# EAGLE board MSi001_board (EAGLE 9.6.2)
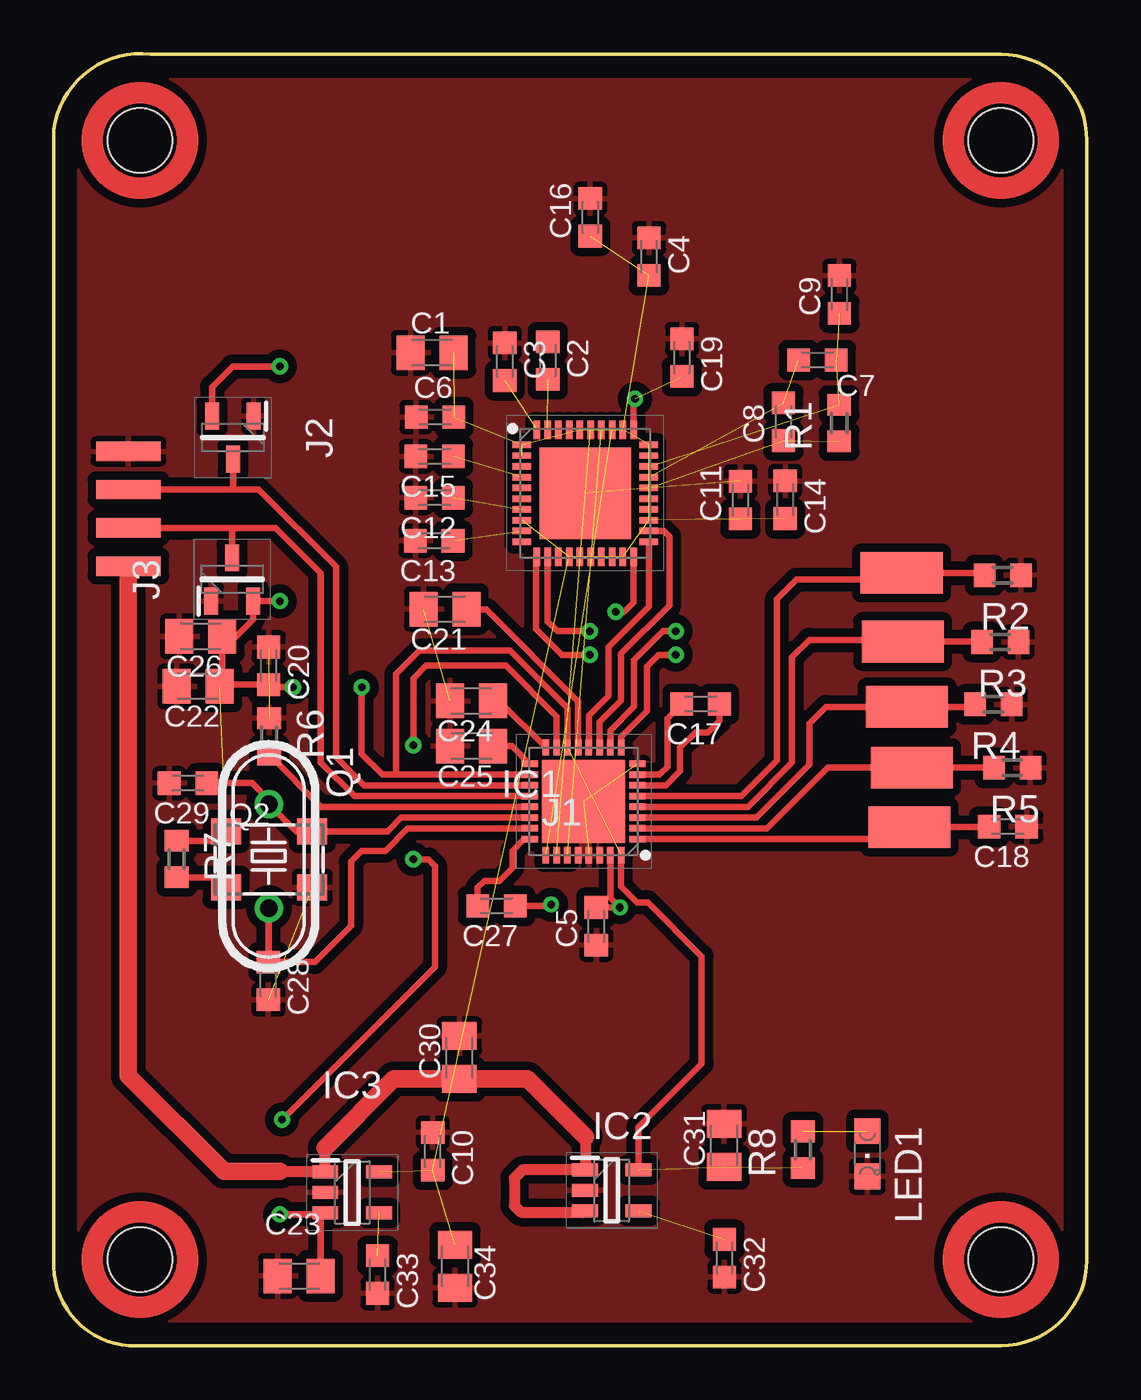
[diagram p0: board, top side]
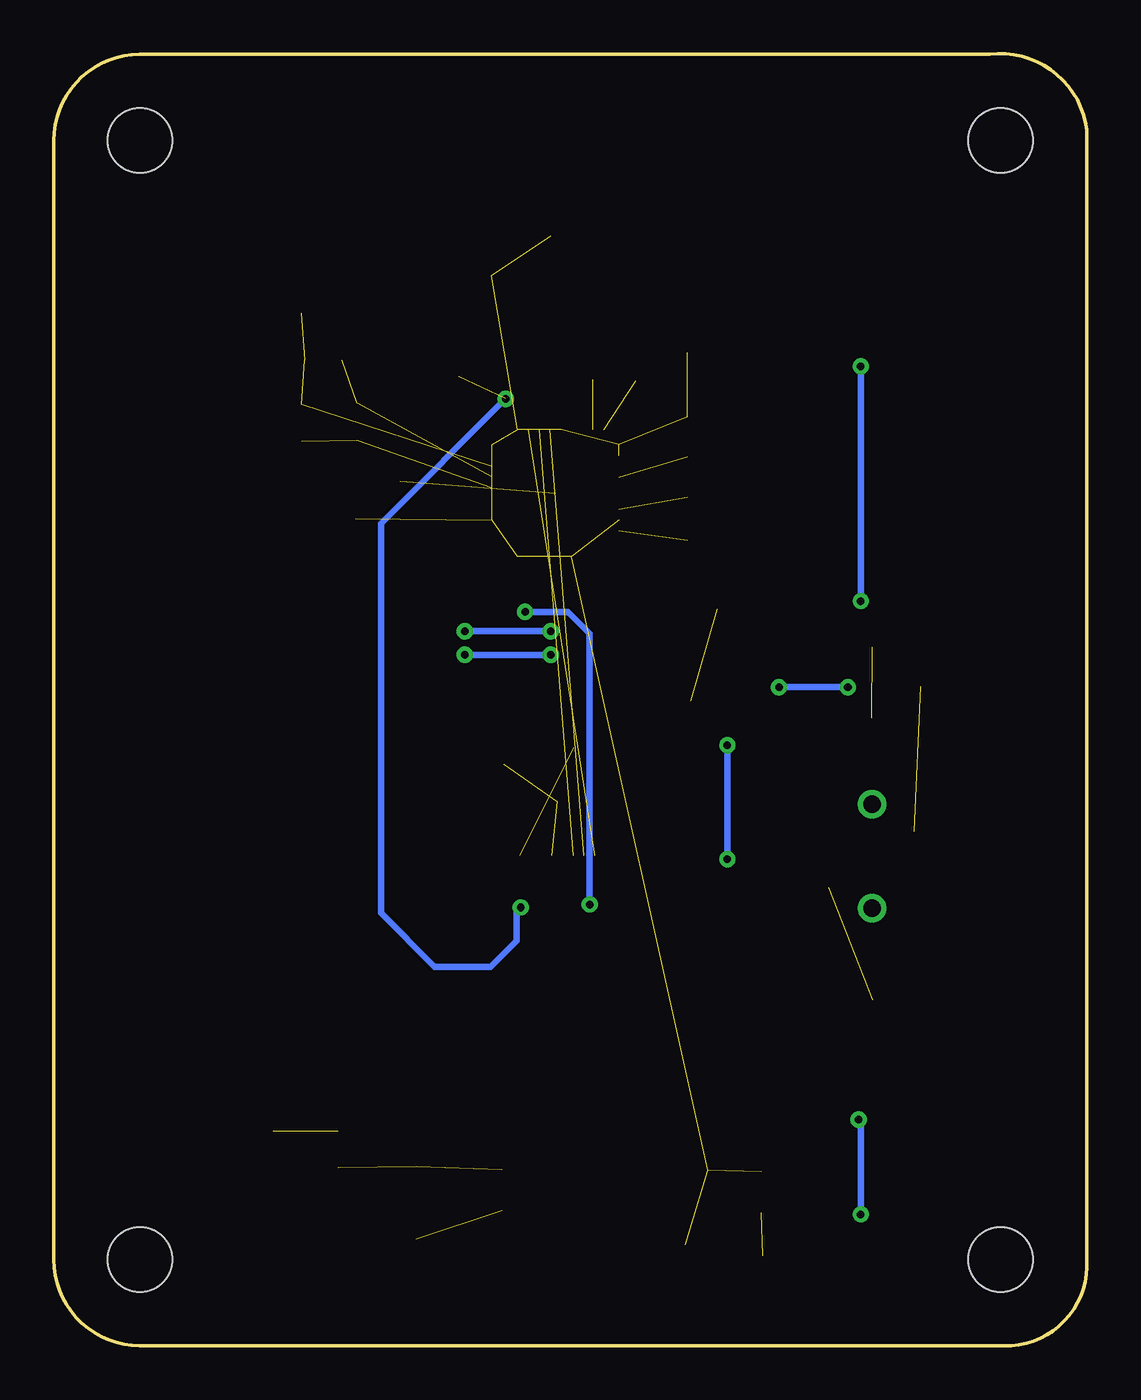
[diagram p1: board, bottom side, seen from below]

Size 48.01 x 60.03 mm. Coordinates in mm from the lower left corner, seen from the top.
Outline: 3.51,0 arc-90 0.01,4 0.01,56.5 arc-90 4.51,60 44.01,60 arc-90 48.01,56 48.01,4 arc-90 44.01,0 3.51,0
Copper layers (1*16): Top 0.035mm / dielectric 1.5mm / Bottom 0.035mm
Design rules "default": minimum track width 6mil, minimum drill 0.35mm, track to track 6mil, track to pad 6mil, pad to pad 6mil, via to via 6mil, smd to smd 6mil, copper to edge 40mil, drill to drill 6mil, minimum pad ring 10mil, minimum via ring 8mil, stop-mask expansion 4mil, vias tented up to drill 0mil, thermal gap 10mil

## Footprints (pad centres in the part's own frame; a part is rotated, then mirrored left to right if it is on the bottom)
C0805K = smd 1.3 x 1.6: 1 -1,0; 2 1,0
C0603K = smd 1.05 x 1.08: 1 -0.875,0; 2 0.875,0
QFN50P600X600X90-41N = smd 0.85 x 0.3: 1 -2.95,2.25; 2 -2.95,1.75; 3 -2.95,1.25; 4 -2.95,0.75; 5 -2.95,0.25; 6 -2.95,-0.25; 7 -2.95,-0.75; 8 -2.95,-1.25; 9 -2.95,-1.75; 10 -2.95,-2.25; 21 2.95,-2.25; 22 2.95,-1.75; 23 2.95,-1.25; 24 2.95,-0.75; 25 2.95,-0.25; 26 2.95,0.25; 27 2.95,0.75; 28 2.95,1.25; 29 2.95,1.75; 30 2.95,2.25 | smd 0.3 x 0.85: 11 -2.25,-2.95; 12 -1.75,-2.95; 13 -1.25,-2.95; 14 -0.75,-2.95; 15 -0.25,-2.95; 16 0.25,-2.95; 17 0.75,-2.95; 18 1.25,-2.95; 19 1.75,-2.95; 20 2.25,-2.95; 31 2.25,2.95; 32 1.75,2.95; 33 1.25,2.95; 34 0.75,2.95; 35 0.25,2.95; 36 -0.25,2.95; 37 -0.75,2.95; 38 -1.25,2.95; 39 -1.75,2.95; 40 -2.25,2.95 | smd 4.25 x 4.25: 41 0,0
SOT95P280X145-5N = smd 1.2 x 0.6: 1 -1.25,0.95; 2 -1.25,0; 3 -1.25,-0.95; 4 1.25,-0.95; 5 1.25,0.95
QFN50P500X500X90-33N = smd 0.75 x 0.3: 1 -2.5,1.75; 2 -2.5,1.25; 3 -2.5,0.75; 4 -2.5,0.25; 5 -2.5,-0.25; 6 -2.5,-0.75; 7 -2.5,-1.25; 8 -2.5,-1.75; 17 2.5,-1.75; 18 2.5,-1.25; 19 2.5,-0.75; 20 2.5,-0.25; 21 2.5,0.25; 22 2.5,0.75; 23 2.5,1.25; 24 2.5,1.75 | smd 0.3 x 0.75: 9 -1.75,-2.5; 10 -1.25,-2.5; 11 -0.75,-2.5; 12 -0.25,-2.5; 13 0.25,-2.5; 14 0.75,-2.5; 15 1.25,-2.5; 16 1.75,-2.5; 25 1.75,2.5; 26 1.25,2.5; 27 0.75,2.5; 28 0.25,2.5; 29 -0.25,2.5; 30 -0.75,2.5; 31 -1.25,2.5; 32 -1.75,2.5 | smd 3.85 x 3.85: 33 0,0
SOT97P230X110-3N = smd 1.25 x 0.65: 1 -1,0.97; 2 -1,-0.97; 3 1,0
USB-SOLDER-PADS = smd 3 x 0.9: D+ 0,-0.889; D- 0,0.889; GND 0,-2.667; VBUS 0,2.667
CHIPLED_0805 = smd 1.2 x 1.2: A 0,-1.05; C 0,1.05
HC49/S = drill 0.813: 1 -2.413,0; 2 2.413,0
5.0X3.2_KXO-83-TCXO = smd 1.4 x 1.2: 1 -2,-1.3; 2 2,-1.3; 3 2,1.3; 4 -2,1.3
R0603 = smd 1 x 1.1: 1 -0.85,0; 2 0.85,0
3MM_HOLE = hole 3: 0,0
SMD_PIN = smd 1.93 x 3.81: P$1 0,0

## Placement (x,y rotation side)
C1  1uF  [C0805K]  17.58,46.14 0 top
C2  100nF  [C0603K]  22.96,45.77 270 top
C3  100nF  [C0603K]  20.96,45.72 270 top
C4  10nF  [C0603K]  27.66,50.6 270 top
C5  10nF  [C0603K]  25.21,19.49 90 top
C6  10nF  [C0603K]  17.72,43.15 0 top
C7  6800pF  [C0603K]  35.48,45.8 180 top
C8  33nF  [C0603K]  33.91,42.93 90 top
C9  10nF  [C0603K]  36.51,48.85 90 top
C10  10nF  [C0603K]  17.61,9.03 270 top
C11  10nF  [C0603K]  31.91,39.29 90 top
C12  10nF  [C0603K]  17.7,39.4 180 top
C13  10nF  [C0603K]  17.68,37.4 180 top
C14  10nF  [C0603K]  33.99,39.31 270 top
C15  10nF  [C0603K]  17.7,41.32 180 top
C16  10nF  [C0603K]  24.93,52.43 90 top
C17  10nF  [C0603K]  30.06,29.82 180 top
C18  10nF  [C0603K]  44.34,24.12 180 top
C19  10nF  [C0603K]  29.19,45.91 270 top
C20  10nF  [C0603K]  9.99,31.59 270 top
C21  10uF  [C0805K]  18.18,34.22 180 top
C22  10uF  [C0805K]  6.72,30.64 180 top
C23  10uF  [C0805K]  11.4,3.24 180 top
C24  1uF  [C0805K]  19.41,29.96 180 top
C25  1uF  [C0805K]  19.42,27.86 180 top
C26  1uF  [C0805K]  6.83,32.96 180 top
C27  10nF  [C0603K]  20.58,20.44 180 top
C28  18pF  [C0603K]  9.97,16.95 270 top
C29  18pF  [C0603K]  6.24,26.14 180 top
C30  10uF  [C0805K]  18.85,13.39 90 top
C31  10uF  [C0805K]  31.15,9.31 90 top
C32  10nF  [C0603K]  31.17,4.07 270 top
C33  10nF  [C0603K]  15.05,3.31 270 top
C34  10uF  [C0805K]  18.65,3.69 270 top
IC1  MSI001  [QFN50P600X600X90-41N]  24.7,39.61 0 top
IC2  LP2985-33  [SOT95P280X145-5N]  25.93,7.22 0 top
IC3  LP2985-28  [SOT95P280X145-5N]  13.87,7.12 0 top
J1  MSI2500  [QFN50P500X500X90-33N]  24.62,25.29 180 top
J2  BAV99-G  [SOT97P230X110-3N]  8.33,42.2 270 top
J3  BAV99-G  [SOT97P230X110-3N]  8.29,35.61 90 top
JP1  USB_SOLDER_PADS  [USB-SOLDER-PADS]  3.47,38.89 180 top
LED1  [CHIPLED_0805]  37.81,8.92 180 top
Q1  24MHz  [HC49/S]  9.99,22.75 270 top
Q2  [5.0X3.2_KXO-83-TCXO]  10.01,22.6 0 top
R1  390R  [R0603]  36.5,42.87 90 top
R2  10k  [R0603]  44.1,35.8 180 top
R3  10k  [R0603]  43.98,32.7 180 top
R4  10k  [R0603]  43.66,29.8 180 top
R5  10k  [R0603]  44.54,26.85 180 top
R6  510R  [R0603]  10.01,28.31 270 top
R7  10k  [R0603]  5.71,22.61 270 top
R8  10k  [R0603]  34.81,9.11 90 top
U$1  3MM_HOLE  [3MM_HOLE]  4.01,4 0 top
U$2  SMD_PIN  [SMD_PIN]  39.87,26.86 90 top
U$3  SMD_PIN  [SMD_PIN]  39.65,29.68 270 top
U$4  SMD_PIN  [SMD_PIN]  39.45,32.72 270 top
U$5  SMD_PIN  [SMD_PIN]  39.4,35.91 270 top
U$6  3MM_HOLE  [3MM_HOLE]  44.01,4 0 top
U$7  3MM_HOLE  [3MM_HOLE]  4.01,56 0 top
U$8  3MM_HOLE  [3MM_HOLE]  44.01,56 0 top
VCC_GPIO  SMD_PIN  [SMD_PIN]  39.75,24.1 270 top

## Library data of the parts
C1-C34 = rcl; SPICEPREFIX: C
IC1 = MSI001; DESCRIPTION: Multi-mode Tuner; HEIGHT: 0.9mm; MANUFACTURER_NAME: MIRICS; MANUFACTURER_PART_NUMBER: MSI001
IC2 IC3 = LP2985-30DBVR; ARROW_PART_NUMBER: LP2985-30DBVR; ARROW_PRICE-STOCK: https://www.arrow.com/en/products/lp2985-30dbvr/texas-instruments; DESCRIPTION: 150-mA Low-noise Low-dropout Regulator With Shutdown; HEIGHT: 1.45mm; MANUFACTURER_NAME: Texas Instruments; MANUFACTURER_PART_NUMBER: LP2985-30DBVR; MOUSER_PART_NUMBER: 595-LP2985-30DBVR; MOUSER_PRICE-STOCK: https://www.mouser.co.uk/ProductDetail/Texas-Instruments/LP2985-30DBVR?qs=iSMark9AYDWJqjjCQuouOw%3D%3D
J1 = MSI2500; DESCRIPTION: Mirics FlexiTVTM USB Interface IC; HEIGHT: 0.9mm; MANUFACTURER_NAME: MIRICS; MANUFACTURER_PART_NUMBER: MSI2500
J2 J3 = BAV99-G; DESCRIPTION: BAV99-G; HEIGHT: 1.1mm; MANUFACTURER_NAME: Sensitron Semiconductors; MANUFACTURER_PART_NUMBER: BAV99-G
JP1 = SparkFun-Connectors
LED1 = led
Q1 = crystal; OC_FARNELL: 1667008; OC_NEWARK: unknown
Q2 = crystal-geyer_V1_0
R1-R8 = rcl; SPICEPREFIX: R
U$1-U$8 VCC_GPIO = mylib

## Nets
GND: C1.1 C3.1 C4.1 C5.1 C6.1 C9.2 C10.1 C11.2 C12.2 C13.2 C14.1 C15.2 C16.2 C18.1 C19.1 C20.1 C21.2 C22.2 C23.2 C24.2 C25.2 C26.2 C28.2 C29.2 C30.2 C31.2 C32.2 C33.2 C34.2 IC1.41 IC2.2 IC3.2 J1.8 J1.28 J1.29 J1.30 J1.33 J2.1 J3.1 JP1.GND LED1.C Q2.2 R2.1 R3.1 R4.1 R5.1 R6.1
HFPDRT: C2.1
I_IN_N: IC1.12 J1.10
I_IN_P: IC1.11 J1.9
LBAND-IN: IC1.24
LBAND-INB: IC1.25
N$1: C2.2 IC1.39
N$2: C3.2 IC1.40
N$3: C7.1 C9.1 IC1.28 R1.2
N$4: C8.1 IC1.26 R1.1
N$5: C7.2 C8.2 IC1.27
N$6: C12.1 IC1.7
N$7: C13.1 IC1.9
N$8: C15.1 IC1.4
N$9: C17.2 J1.7
N$10: C17.1 J1.6
N$11: C18.2 J1.1 VCC_GPIO.P$1
N$12: J1.2 R5.2 U$2.P$1
N$13: J1.3 R4.2 U$3.P$1
N$14: J1.4 R3.2 U$4.P$1
N$15: J1.5 R2.2 U$5.P$1
N$16: C21.1 J1.13
N$17: C24.1 J1.16
N$18: C25.1 J1.17
N$19: J1.21 R6.2
N$20: C27.2 J1.24
N$21: C29.1 J1.22 Q1.1 Q2.3
N$22: C28.1 J1.23 Q1.2
N$23: LED1.A R8.2
N$24: Q2.1 R7.2
N$25: C30.1 IC2.1 IC2.3 IC3.1 JP1.VBUS
N$26: C33.1 IC3.4
N$27: C32.1 IC2.4
Q_IN_N: IC1.21 J1.12
Q_IN_P: IC1.22 J1.11
REFCLK: C27.1 IC1.20
SPI_CLK: IC1.34 J1.27
SPI_DATA: IC1.35 J1.26
SPI_LAT: IC1.33 J1.25
UHF_400_1000MHZ: IC1.6
USB_DM: J1.20 J3.3 JP1.D-
USB_DP: J1.19 J2.3 JP1.D+
V18-SYNTH: C23.1 IC3.3 J1.15
VDDI: C5.2 C19.2 IC1.31 J1.31
VDIG: C20.2 C22.1 C26.1 C31.1 IC2.5 J1.14 J1.18 J1.32 J2.2 J3.2 Q2.4 R7.1 R8.1
VHF_50_120MHZ: IC1.10
VHF_120_250MHZ: IC1.3
VRF: C1.2 C4.2 C6.2 C10.2 C11.1 C14.2 C16.1 C34.1 IC1.1 IC1.2 IC1.8 IC1.14 IC1.15 IC1.18 IC1.19 IC1.23 IC1.29 IC1.30 IC1.32 IC1.36 IC3.5

## Tracks (layer width: path | path; a pad name or v marks a point on that pad's centre or on a via)
GND  (6 unrouted)
  pour Top (isolate 0.4): 50.51,-3 -2.49,-3 -2.49,62.5 50.51,62.5
I_IN_N  (via drill 0.35)
  Top 0.305: J1.10 25.87,28.59 26.97,29.69 26.97,31.86 28.31,33.2 v28.91,33.2 | IC1.12 22.95,33.66 23.41,33.2 v24.91,33.2
  Bottom 0.305: v28.91,33.2 v24.91,33.2
I_IN_P  (via drill 0.35)
  Top 0.305: J1.9 26.37,28.29 27.57,29.49 27.57,31.56 28.11,32.1 v28.91,32.1 | v24.91,32.1 23.61,32.1 22.41,33.3 22.41,36.62 IC1.11
  Bottom 0.305: v28.91,32.1 v24.91,32.1
N$1  (1 unrouted)
N$2  (1 unrouted)
N$3  (3 unrouted)
N$4  (2 unrouted)
N$5  (2 unrouted)
N$6  (1 unrouted)
N$7  (1 unrouted)
N$8  (1 unrouted)
N$9
  Top 0.305: J1.7 28.15,26.54 28.51,26.9 28.51,29.14 C17.2
N$10
  Top 0.305: J1.6 28.45,26.04 29.11,26.7 29.11,27.8 29.81,28.5 30.41,28.5 30.93,29.02 C17.1
N$11
  Top 0.305: J1.1 39.19,23.54 VCC_GPIO.P$1 43.44,24.1 C18.2
N$12
  Top 0.305: J1.2 33.15,24.04 35.97,26.86 U$2.P$1 R5.2
N$13
  Top 0.305: J1.3 32.65,24.54 35.11,27 35.11,28.9 35.89,29.68 U$3.P$1 42.69,29.68 R4.2
N$14
  Top 0.305: J1.4 32.25,25.04 34.31,27.1 34.31,32 35.11,32.8 40.51,32.8 40.71,32.6 39.57,32.6 U$4.P$1 43.11,32.72 R3.2
N$15
  Top 0.305: J1.5 31.95,25.54 33.61,27.2 33.61,34.7 34.51,35.6 40.11,35.6 39.8,35.91 U$5.P$1 43.14,35.91 R2.2
N$16
  Top 0.305: J1.13 24.37,29.94 20.11,34.2 19.18,34.2 C21.1
N$17
  Top 0.305: J1.16 20.7,29.96 C24.1
N$18
  Top 0.305: J1.17 21.3,27.86 C25.1
N$19
  Top 0.305: J1.21 12.43,25.04 R6.2
N$20
  Top 0.305: J1.24 21.85,23.54 21.31,23 21.31,22.2 20.71,21.6 20.01,21.6 19.7,21.3 C27.2
N$21
  Top 0.305: C29.1 9.21,26.14 9.99,25.36 Q1.1 11.25,23.9 Q2.3 15.51,23.9 16.15,24.54 J1.22
N$22
  Top 0.305: J1.23 16.45,24.04 15.41,23 14.31,23 13.81,22.5 13.81,19.5 12.13,17.82 C28.1 9.99,17.84 Q1.2
N$23  (1 unrouted)
N$24
  Top 0.305: R7.2 7.55,21.76 Q2.1
N$25
  Top 0.508: 10.51,8.1 12.59,8.1 IC3.1 12.62,9.19 12.61,9.2 | 24.71,9.7 24.71,8.2 IC2.1 21.78,8.17 21.41,7.8 21.41,6.5 21.71,6.2 24.61,6.2 IC2.3
  Top 0.813: JP1.VBUS 3.47,12.54 7.91,8.1 10.51,8.1 | 12.61,9.2 15.8,12.39 C30.1 22.02,12.39 24.71,9.7
N$26  (1 unrouted)
N$27  (1 unrouted)
Q_IN_N
  Top 0.305: J1.12 24.87,29.29 25.77,30.19 25.77,32.46 27.65,34.34 IC1.21
Q_IN_P
  Top 0.305: IC1.22 28.35,37.86 28.61,37.6 28.61,34.4 26.37,32.16 26.37,29.99 25.37,28.99 J1.11
REFCLK  (via drill 0.35)
  Top 0.305: C27.1 22.97,20.44 23.01,20.4 v23.11,20.5 | IC1.20 26.95,34.54 26.51,34.1 v26.11,34.1
  Bottom 0.305: v23.11,20.5 23.11,33.1 24.11,34.1 v26.11,34.1
SPI_CLK  (1 unrouted)
SPI_DATA  (1 unrouted)
SPI_LAT  (1 unrouted)
USB_DM
  Top 0.305: J1.20 13.97,25.54 12.41,27.1 12.41,35.9 10.31,38 8.31,38 | 8.31,38 JP1.D- | J3.3 8.29,37.98 8.31,38
USB_DP
  Top 0.305: 8.21,39.78 9.53,39.78 13.11,36.2 13.11,27.35 14.41,26.04 J1.19 | 8.21,39.78 JP1.D+ | J2.3 8.33,39.9 8.21,39.78
V18-SYNTH  (via drill 0.35)
  Top 0.305: C23.1 12.4,5.95 IC3.3 12.55,6.1 v10.51,6.1 | v10.61,10.5 17.71,17.6 17.71,22.3 17.41,22.6 v16.71,22.6 | v16.71,27.9 16.71,31 17.31,31.6 21.01,31.6 23.37,29.24 J1.15
  Bottom 0.305: v10.51,6.1 10.51,10.4 v10.61,10.5 | v16.71,27.9 v16.71,22.6
VDDI  (via drill 0.35)  (1 unrouted)
  Top 0.305: J1.31 25.87,20.8 v26.31,20.36 C5.2 | IC1.31 26.95,43.94 v27.01,44
  Bottom 0.305: v27.01,44 32.81,38.2 32.81,20.1 30.31,17.6 27.71,17.6 26.51,18.8 26.51,20.1 26.31,20.3 v26.31,20.36
VDIG  (via drill 0.35)  (4 unrouted)
  Top 0.305: J1.18 15.91,26.54 | 15.91,26.54 15.27,26.54 14.31,27.5 v14.31,30.6 | v11.11,30.6 10.1,30.6 C20.2 7.79,30.71 C22.1 7.83,30.75 C26.1 8.47,32.96 9.26,33.75 J3.2 10.4,34.61 10.41,34.6 v10.51,34.6 | J1.14 23.87,29.64 21.21,32.3 17.01,32.3 15.91,31.2 15.91,26.54 | v10.51,45.5 8.31,45.5 7.36,44.55 J2.2 | R7.1 7.57,23.46 Q2.4 | IC2.5 27.18,10.17 30.11,13.1 30.11,18.1 27.61,20.6 27.11,20.6 26.37,21.34 J1.32
  Bottom 0.305: v14.31,30.6 v11.11,30.6 | v10.51,34.6 v10.51,45.5
VRF  (20 unrouted)